# Altium PCB PCB1.PcbDoc
Units mil, origin at the board's own origin, x right, y up, seen from the top; angles counter-clockwise.
Board outline 6000 x 4000 mil, 2 copper layers (Top Layer, Bottom Layer); 68 components, 83 nets, 314 pads, 0 vias.
Unrouted connection lines stored in the file: 177.
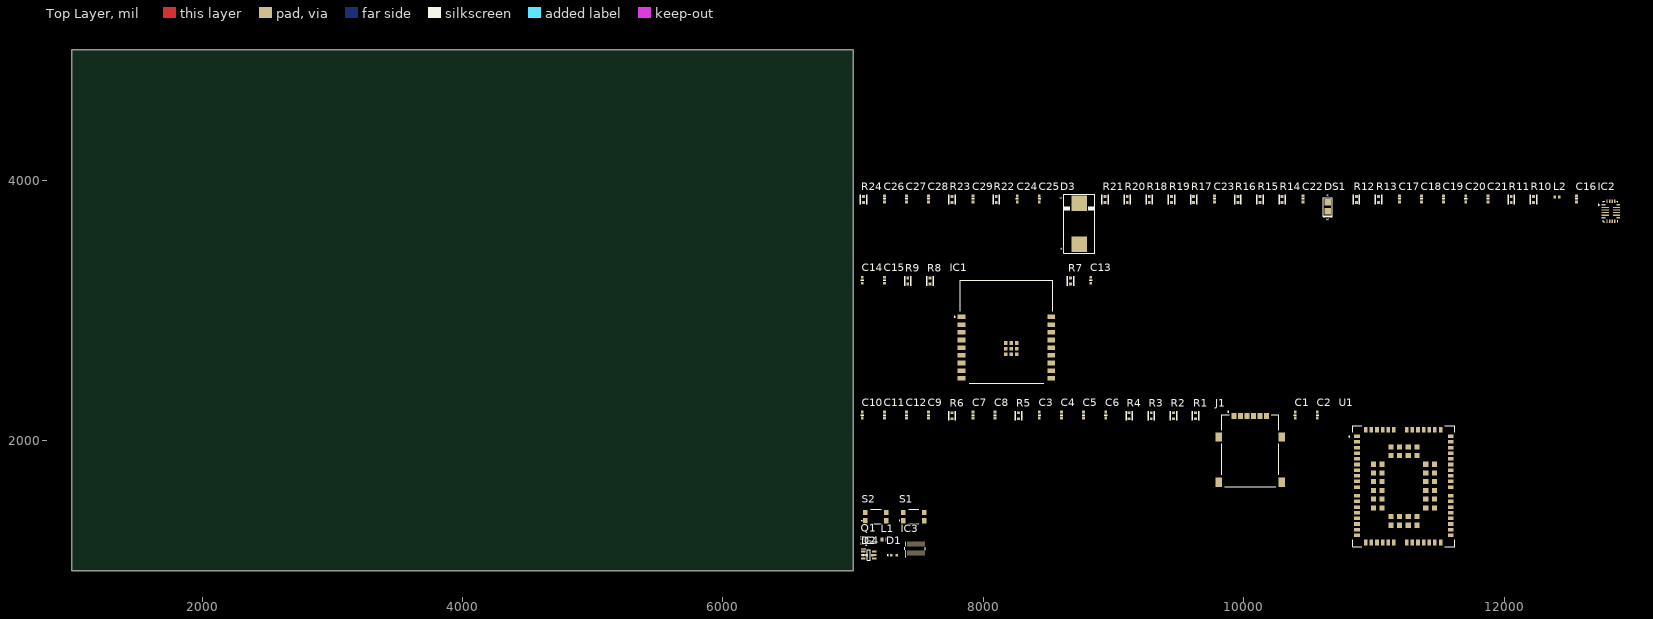
[diagram p0: Top Layer view]
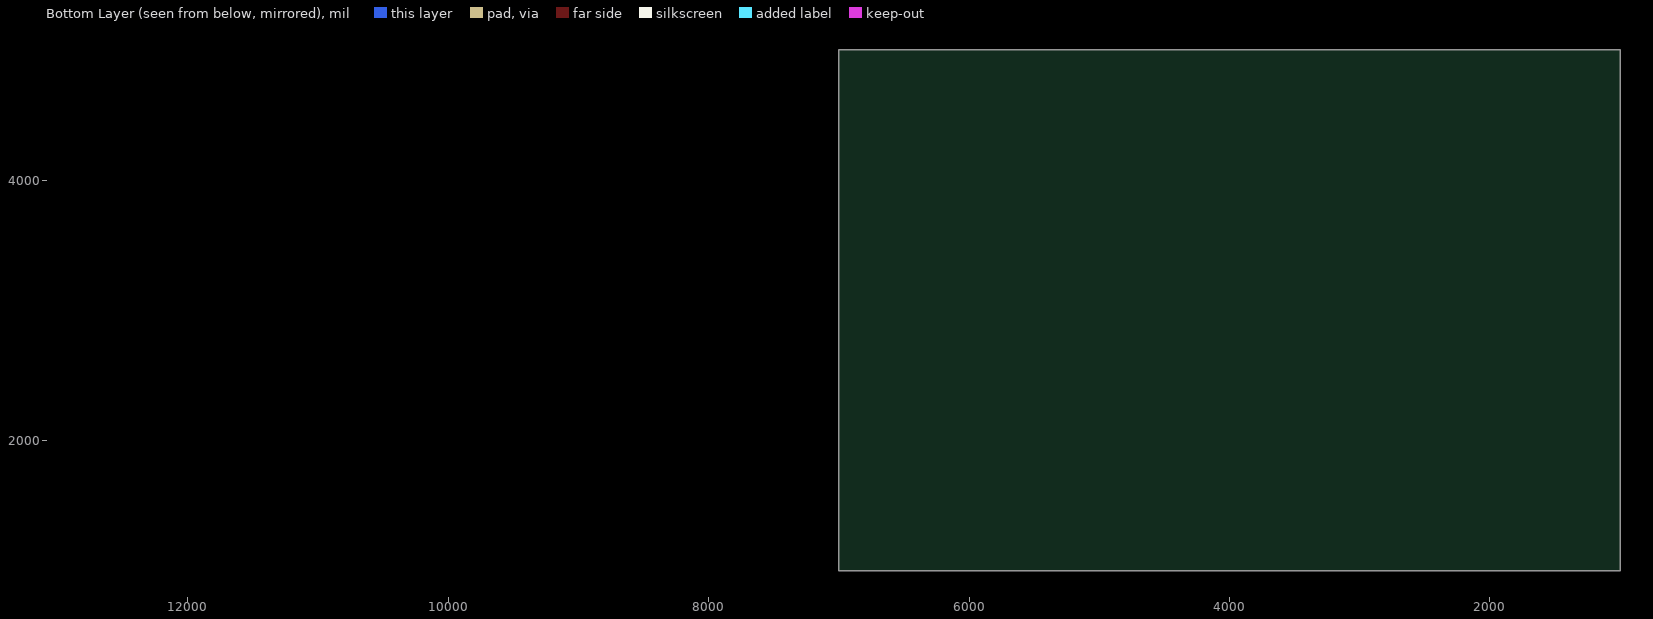
[diagram p1: Bottom Layer view, seen from below]

## Layer stack, top to bottom
Top Solder: solder mask 0.4, Solder Resist, Dk 3.5
Top Layer: signal copper 1.4
Dielectric 1: dielectric 12.6, FR-4, Dk 4.8
Bottom Layer: signal copper 1.4
Bottom Solder: solder mask 0.4, Solder Resist, Dk 3.5

## Board outline
1000,1000 7000,1000 7000,5000 1000,5000

## Design rules (kind name [scope] priority, off if disabled: settings)
Clearance [All] p1: gap=10 ignorepadtopadclearanceinfootprint=FALSE except(0: Arc-Hole Track-Hole SMDPad-Hole THPad-Hole Via-Hole Fill-Hole Poly-Hole Region-Hole Text-Hole)
PolygonConnect [All] p1: connectstyle=Relief reliefconductorwidth=10 reliefentries=4 polygonreliefangle="90 Angle" airgapwidth=10
RoomDefinition MP2617B-SHEET [InComponentClass('MP2617B-SHEET')] p1: confinementstyle=ConfineIn formatcopy=TRUE lockcomponents=FALSE outline 7045,2140 12940,2140 12940,4000 7045,4000
RoomDefinition ESP32WROOM-SHEET [InComponentClass('ESP32WROOM-SHEET')] p2: confinementstyle=ConfineIn formatcopy=TRUE lockcomponents=FALSE outline 7045,2140 12940,2140 12940,4000 7045,4000
RoomDefinition BG95-SHEEET [InComponentClass('BG95-SHEEET')] p3: confinementstyle=ConfineIn formatcopy=TRUE lockcomponents=FALSE outline 7045,1060 12665,1060 12665,4000 7045,4000
RoutingVias [All] p1: holewidth=28 width=50 viastyle="Through Hole" minholewidth=28 minwidth=50 maxholewidth=28 maxwidth=50
SolderMaskExpansion [All] p1: expansion=4 istentingtop=FALSE
Width [All] p1: maxlimit=10 minlimit=10 preferedwidth=10
30 further rules are at their usual default settings.

## Classes and differential pairs
component class MP2617B-SHEET: C16 C17 C18 C19 C20 C21 C22 C23 C24 C25 C26 C27 C28 C29 D3 DS1 IC2 L2 R10 R11 R12 R13 R14 R15 R16 R17 R18 R19 R20 R21 R22 R23 R24
component class ESP32WROOM-SHEET: BOOT C13 C14 C15 IC1 R7 R8 R9 RST S1 S2
component class BG95-SHEEET: C1 C2 C3 C4 C5 C6 C7 C8 C9 C10 C11 C12 D1 D2 IC3 IC4 J1 L1 Q1 Q? R1 R2 R3 R4 R5 R6 U1

## Components (designator, comment, footprint, x,y, rotation, side; value= is the part's Value field where it differs from the comment)
C1 "0.10µF" SMD-0402C 10395,2195 r0 top
C2 "0.10µF" SMD-0402C 10565,2195 r0 top
C3 "0.10µF" SMD-0402C 8430,2195 r0 top
C4 "0.10µF" SMD-0402C 8600,2195 r0 top
C5 "0.10µF" SMD-0402C 8770,2195 r0 top
C6 "0.10µF" SMD-0402C 8940,2195 r0 top
C7 "0.10µF" SMD-0402C 7920,2195 r0 top
C8 "0.10µF" SMD-0402C 8090,2195 r0 top
C9 "100" SMD-0402C 7580,2195 r0 top value=0.10µF
C10 "0.10µF" SMD-0402C 7070,2195 r0 top
C11 "0.10µF" SMD-0402C 7240,2195 r0 top
C12 "0.10µF" SMD-0402C 7410,2195 r0 top
C13 "0.10µF" SMD-0402C 8825,3230 r0 top
C14 "1µF" SMD-0402C 7070,3230 r0 top
C15 "10µF" SMD-0402C 7240,3230 r0 top
C16 "0.10µF" SMD-0402C 12555,3855 r0 top
C17 "2200pF" SMD-0402C 11195,3855 r0 top
C18 "2200pF" SMD-0402C 11365,3855 r0 top
C19 "1µF" SMD-0402C 11535,3855 r0 top
C20 "1µF" SMD-0402C 11705,3855 r0 top
C21 "0.10µF" SMD-0402C 11875,3855 r0 top
C22 "0.10µF" SMD-0402C 10455,3855 r0 top
C23 "1µF" SMD-0402C 9775,3855 r0 top
C24 "2200pF" SMD-0402C 8260,3855 r0 top
C25 "10µF" SMD-0402C 8430,3855 r0 top
C26 "10µF" SMD-0402C 7240,3855 r0 top
C27 "4.7µF" SMD-0402C 7410,3855 r0 top
C28 "0.10µF" SMD-0402C 7580,3855 r0 top
C29 "0.10µF" SMD-0402C 7920,3855 r0 top
D1 "EZA-EG2A50AX" EZAEG2A50AX 7315,1120 r0 top
D2 "EZA-EG2A50AX" EZAEG2A50AX 7125,1120 r0 top
D3 "SS54C-HF" DIO_SMC_DO-214AB 8735,3665 r90 top
DS1 "RED LED" LED_0805 10645,3795 r90 top
IC1 "ESP32-C3-WROOM-02-N4" ESP32C3WROOM02N4 8215,2705 r0 top
IC2 "MP2617BGL-P" MP2617AGLP 12820,3760 r0 top
IC3 "TXB0108DQSR" TXB0108DQSR 7475,1170 r0 top
IC4 "SMF05CT2G" SOT65P210X110-6N 7120,1120 r0 top
J1 "SIM8060-6-0-14-00-A" GCT_SIM8060-6-0-14-00-A 10050,1920 r0 top
L1 "LQW15AN4N0B80D" INDC1006X60N 7240,1240 r0 top
L2 "MLZ1005M1R0WT000" IND_MLZ1005M1R0WT000 12405,3870 r0 top
Q1 "DTC043ZEBTL" SOTFL50P160X85-3N 7100,1225 r0 top
R1 "51" SMD-0402-RES 9630,2190 r0 top
R2 "51" SMD-0402-RES 9460,2190 r0 top
R3 "15k" SMD-0402-RES 9290,2190 r0 top
R4 "51" SMD-0402-RES 9120,2190 r0 top
R5 "0" SMD-0402-RES 8270,2190 r0 top value=10
R6 "10" SMD-0402-RES 7760,2190 r0 top
R7 "10k" SMD-0402-RES 8670,3225 r0 top
R8 "10k" SMD-0402-RES 7590,3225 r0 top
R9 "10k" SMD-0402-RES 7420,3225 r0 top
R10 "2k" SMD-0402-RES 12225,3850 r0 top
R11 "10k" SMD-0402-RES 12055,3850 r0 top
R12 "0" SMD-0402-RES 10865,3850 r0 top value=0.047
R13 "0" SMD-0402-RES 11035,3850 r0 top value=0.047
R14 "0" SMD-0402-RES 10295,3850 r0 top value=0.047
R15 "1k" SMD-0402-RES 10125,3850 r0 top
R16 "10k" SMD-0402-RES 9955,3850 r0 top
R17 "24k" SMD-0402-RES 9615,3850 r0 top
R18 "2.7k" SMD-0402-RES 9275,3850 r0 top
R19 "10k" SMD-0402-RES 9445,3850 r0 top
R20 "20k" SMD-0402-RES 9105,3850 r0 top
R21 "10M" SMD-0402-RES 8935,3850 r0 top
R22 "0" SMD-0402-RES 8100,3850 r0 top value=0.047
R23 "10M" SMD-0402-RES 7760,3850 r0 top
R24 "10k" SMD-0402-RES 7080,3850 r0 top
S1 "KMR241NGLFS" KMR241NGLFS 7465,1415 r0 top
S2 "KMR241NGLFS" KMR241NGLFS 7175,1415 r0 top
U1 "BG95M3LA-64-SGNS" XCVR_BG95M3LA-64-SGNS 11230,1650 r0 top

## Footprints (in the part's own frame and the unit in brackets; to place one, negate y for a bottom-side part, rotate by r counter-clockwise, add the part's x,y. Pads: shape width x height; smd on the part's side, far side on the other; paste and mask are expansions set on the pad)
DIO_SMC_DO-214AB [mm] "Diode"
  rect 3x3 smd: A(-4.038,-0.016) K(3.962,-0.016)
  silkscreen extent -5.78,-3.03 5.73,2.97, body extent -3.97,-2.95 3.98,2.95, height 2.27
ESP32C3WROOM02N4 [mm]
  rect 1.5x0.9 smd: 1(-9.71,6.2) 2(-9.71,4.7) 3(-9.71,3.2) 4(-9.71,1.7) 5(-9.71,0.2) 6(-9.71,-1.3) 7(-9.71,-2.8) 8(-9.71,-4.3) 9(-9.71,-5.8) 10(7.79,-5.8) 11(7.79,-4.3) 12(7.79,-2.8) 13(7.79,-1.3) 14(7.79,0.2) 15(7.79,1.7) 16(7.79,3.2) 17(7.79,4.7) 18(7.79,6.2)
  rect 0.7x0.7 smd: 19(0,0) 20(1.1,0) 21(1.1,1.1) 22(0,1.1) 23(-1.1,1.1) 24(-1.1,0) 25(-1.1,-1.1) 26(0,-1.1) 27(1.1,-1.1)
  silkscreen extent -11.16,-6.7 8.04,13.3, body extent -10.31,-6.7 7.69,13.3, height 3.2
EZAEG2A50AX [mm]
  rect 0.475x0.5 smd: 1(-0.525,0) 2(0.525,0)
  silkscreen extent -1.3,-0.1 -1.1,0.1, body extent -0.71,-0.25 0.71,0.25, height 0.48
GCT_SIM8060-6-0-14-00-A [mm]
  rect 0.9x1.2 smd: C1(-3.175,6.8) C2(-0.635,6.8) C3(1.905,6.8) C5(-1.905,6.8) C6(0.635,6.8) C7(3.175,6.8)
  rect 1.3x1.8 smd: S1(-6.15,2.7) S2(6.15,2.7) S3(6.15,-6.1) S4(-6.15,-6.1)
  silkscreen extent -5.6,-7 5.6,7.76
IND_MLZ1005M1R0WT000 [mm]
  rect 0.5x0.5 smd: 1(-0.45,0) 2(0.45,0)
  body extent -0.5,-0.25 0.5,0.25, height 0.55
INDC1006X60N [mm]
  rect 0.51x0.73 smd: 1(-0.46,0) 2(0.46,0)
  body extent -0.5,-0.3 0.5,0.3, height 0.6
KMR241NGLFS [mm]
  rect 0.9x1 smd: 1(-2.05,-0.8) 2(2.05,-0.8) 3(2.05,0.8) 4(-2.05,0.8)
  silkscreen extent -2.8,-1.4 1,1.4, body extent -2.41,-1.4 2.41,1.4, height 2
LED_0805 [mm] "LED"
  rect 1.2x1.2 smd mask+0.076: A(0.889,0) K(-0.889,0)
  silkscreen extent -1.99,-0.89 1.73,0.89, body extent -1.01,-0.62 1.01,0.63, height 1.1
MP2617AGLP [mm]
  rect 0.7x0.25 smd: 1(-1.45,1.25) 6(-1.45,-1.25) 11(1.45,-1.25) 16(1.45,1.25)
  rect 1.4x0.25 smd: 2(-1.1,0.75) 3(-1.1,0.25) 4(-1.1,-0.25) 5(-1.1,-0.75) 12(1.1,-0.75) 13(1.1,-0.25) 14(1.1,0.25) 15(1.1,0.75)
  rect 0.25x0.7 smd: 7(-0.75,-1.95) 8(-0.25,-1.95) 9(0.25,-1.95) 10(0.75,-1.95) 17(0.75,1.95) 18(0.25,1.95) 19(-0.25,1.95) 20(-0.75,1.95)
  silkscreen extent -2.5,-2 1.38,2, body extent -1.49,-2 1.38,2, height 1.15
SMD-0402-RES [mm]
  rect 0.55x0.55 smd: 1(0,0.584) 2(0,-0.584)
  silkscreen extent -0.6,-0.9 0.6,0.9, body extent -0.28,-0.57 0.27,0.58, height 0.41
SMD-0402C [mm]
  rect 0.55x0.55 smd: 1(0,0.584) 2(0,-0.584)
  silkscreen extent -0.25,0 0.25,0, body extent -0.25,-0.51 0.25,0.51, height 0.51
SOT65P210X110-6N [mm]
  rect 0.85x0.4 smd: 1(-1.05,0.65) 2(-1.05,0) 3(-1.05,-0.65) 4(1.05,-0.65) 5(1.05,0) 6(1.05,0.65)
  silkscreen extent -1.48,-1 0.28,1.2, body extent -1.05,-1 1.05,1, height 1.1
SOTFL50P160X85-3N [mm]
  rect 0.64x0.47 smd: 1(-0.75,0.5) 2(-0.75,-0.5) 3(0.75,0)
  silkscreen extent -1.07,-0.8 0.08,0.98, body extent -0.8,-0.8 0.8,0.8, height 0.85
TXB0108DQSR [mm]
  rect 0.2x1.1 smd: 1(-1.8,-0.85)
  rect 0.2x1 smd: 2(-1.4,-0.9) 3(-1,-0.9) 4(-0.6,-0.9) 5(-0.2,-0.9) 6(0.2,-0.9) 7(0.6,-0.9) 8(1,-0.9) 9(1.4,-0.9) 10(1.8,-0.9) 11(1.8,0.9) 12(1.4,0.9) 13(1,0.9) 14(0.6,0.9) 15(0.2,0.9) 16(-0.2,0.9) 17(-0.6,0.9) 18(-1,0.9) 19(-1.4,0.9) 20(-1.8,0.9)
  silkscreen extent -2,-1.6 2,0.3, body extent -2,-1 2,1, height 0.55
XCVR_BG95M3LA-64-SGNS [mm]
  rect 1.1x0.7 smd paste-2: 1(-9.15,9.7) 2(-9.15,8.6) 3(-9.15,7.5) 4(-9.15,6.4) 5(-9.15,5.3) 6(-9.15,4.2) 7(-9.15,3.1) 8(-9.15,2) 9(-9.15,0.9) 10(-9.15,-0.2) 11(-9.15,-1.9) 12(-9.15,-3) 13(-9.15,-4.1) 14(-9.15,-5.2) 15(-9.15,-6.3) 16(-9.15,-7.4) 17(-9.15,-8.5) 18(-9.15,-9.6) 32(9.15,-9.6) 33(9.15,-8.5) 34(9.15,-7.4) 35(9.15,-6.3) 36(9.15,-5.2) 37(9.15,-4.1) 38(9.15,-3) 39(9.15,-1.9) 40(9.15,-0.2) 41(9.15,0.9) 42(9.15,2) 43(9.15,3.1) 44(9.15,4.2) 45(9.15,5.3) 46(9.15,6.4) 47(9.15,7.5) 48(9.15,8.6) 49(9.15,9.7)
  rect 0.7x1.1 smd paste-2: 19(-7.45,-11) 20(-6.35,-11) 21(-5.25,-11) 22(-4.15,-11) 23(-3.05,-11) 24(-1.95,-11) 25(0.55,-11) 26(1.65,-11) 27(2.75,-11) 28(3.85,-11) 29(4.95,-11) 30(6.05,-11) 31(7.15,-11) 50(7.15,11) 51(6.05,11) 52(4.95,11) 53(3.85,11) 54(2.75,11) 55(1.65,11) 56(0.55,11) 57(-1.95,11) 58(-3.05,11) 59(-4.15,11) 60(-5.25,11) 61(-6.35,11) 62(-7.45,11)
  rect 1x1 smd paste-1: 63(-5.95,4.25) 64(-5.95,2.55) 65(-5.95,0.85) 66(-5.95,-0.85) 67(-5.95,-2.55) 68(-5.95,-4.25) 69(-2.55,-7.65) 70(-0.85,-7.65) 71(0.85,-7.65) 72(2.55,-7.65) 73(5.95,-4.25) 74(5.95,-2.55) 75(5.95,-0.85) 76(5.95,0.85) 77(5.95,2.55) 78(5.95,4.25) 79(2.55,7.65) 80(0.85,7.65) 81(-0.85,7.65) 82(-2.55,7.65) 83(-4.25,4.25) 84(-4.25,2.55) 85(-4.25,0.85) 86(-4.25,-0.85) 87(-4.25,-2.55) 88(-4.25,-4.25) 89(-2.55,-5.95) 90(-0.85,-5.95) 91(0.85,-5.95) 92(2.55,-5.95) 93(4.25,-4.25) 94(4.25,-2.55) 95(4.25,-0.85) 96(4.25,0.85) 97(4.25,2.55) 98(4.25,4.25) 99(2.55,5.95) 100(0.85,5.95) 101(-0.85,5.95) 102(-2.55,5.95)
  silkscreen extent -10.77,-11.8 9.95,11.8, body extent -9.95,-11.8 9.95,11.8, height 2.4

## Part data
C1 C2 C3 C4 C5 C6 C7 C8 C9 C10 C11 C12 C13 C16 C21 C22 C28 C29: library part GRM152R61A104KE19D, "CAP CER 0.1UF 10V X5R 0402", Digi-Key Part Number=490-10008-1-ND, Manufacturer="Murata Electronics North America", Operating Temperature="-55°C ~ 85°C", Package / Case="0402 (1005 Metric)", Ratings=-, Temperature Coefficient=X5R, Tolerance=±10%, Voltage=10V, @ qty=0, Applications="General Purpose", Datasheets=http://www.murata.com/~/media/webrenewal/support/library/catalog/products/capacitor/mlcc/c02e.pdf, Factory Stock=0, Features="Derating Recommended", Height - Seated (Max)=-, Image=//media.digikey.com/Renders/Murata%20Renders/ZRB-SERIES-0402.jpg, Lead Spacing=-, Lead Style=-, Minimum Quantity=1, Mounting Type="Surface Mount, MLCC", Packaging="Cut Tape (CT)", Part Number=GRM152R61A104KE19D, Part Status=Active, Quantity Available=80241, Series=GRM, Size / Dimension="0.039\" L x 0.020\" W (1.00mm x 0.50mm)", Thickness (Max)="0.009\" (0.22mm)", Unit Price (USD)=0.16
C14 C19 C20 C23: library part GCM155C71A105KE38D, "CAP CER 1UF 10V X7S 0402", Digi-Key Part Number=490-13409-1-ND, Manufacturer="Murata Electronics North America", Operating Temperature="-55°C ~ 125°C", Package / Case="0402 (1005 Metric)", Ratings=AEC-Q200, Temperature Coefficient=X7S, Tolerance=±10%, Voltage=10V, @ qty=0, Applications=Automotive, Datasheets=http://www.murata.com/~/media/webrenewal/support/library/catalog/products/capacitor/mlcc/c03e.ashx, Factory Stock=0, Features=-, Height - Seated (Max)=-, Image=//media.digikey.com/Renders/Murata%20Renders/ZRB-SERIES-0402.jpg, Lead Spacing=-, Lead Style=-, Minimum Quantity=1, Mounting Type="Surface Mount, MLCC", Packaging="Cut Tape (CT)", Part Number=GCM155C71A105KE38D, Part Status=Active, Quantity Available=7240, Series=GCM, Size / Dimension="0.039\" L x 0.020\" W (1.00mm x 0.50mm)", Thickness (Max)="0.022\" (0.55mm)", Unit Price (USD)=0.12
C15 C25 C26: library part GRJ155R60J106ME11D, "CAP CER 10UF 10V X5R 0402", Digi-Key Part Number=490-13211-1-ND, Manufacturer="Murata Electronics North America", Operating Temperature="-55°C ~ 85°C", Package / Case="0402 (1005 Metric)", Ratings=-, Temperature Coefficient=X5R, Tolerance=±20%, Voltage=6.3V, @ qty=0, Applications="Boardflex Sensitive", Datasheets=http://psearch.en.murata.com/capacitor/product/GRJ155R60J106ME11%23.pdf, Factory Stock=0, Features="Derating Recommended, Soft Termination", Height - Seated (Max)=-, Image=//media.digikey.com/Renders/Murata%20Renders/ZRB-SERIES-0402.jpg, Lead Spacing=-, Lead Style=-, Minimum Quantity=1, Mounting Type="Surface Mount, MLCC", Packaging="Cut Tape (CT)", Part Number=GRJ155R60J106ME11D, Part Status=Active, Quantity Available=64064, Series=GRJ, Size / Dimension="0.039\" L x 0.020\" W (1.00mm x 0.50mm)", Thickness (Max)="0.028\" (0.70mm)", Unit Price (USD)=0.23
C17 C18 C24: library part GRM155R61A222KA01D, "CAP CER 22uF 10V X5R 0402", Digi-Key Part Number=490-8251-1-ND, Manufacturer="Murata Electronics North America", Operating Temperature="-55°C ~ 85°C", Package / Case="0402 (1005 Metric)", Ratings=-, Temperature Coefficient=X5R, Tolerance=±10%, Voltage=10V, @ qty=0, Applications="General Purpose", Datasheets=http://www.murata.com/~/media/webrenewal/support/library/catalog/products/capacitor/mlcc/c02e.pdf, Factory Stock=0, Features=-, Height - Seated (Max)=-, Image=//media.digikey.com/Renders/Murata%20Renders/ZRB-SERIES-0402.jpg, Lead Spacing=-, Lead Style=-, Minimum Quantity=1, Mounting Type="Surface Mount, MLCC", Packaging="Cut Tape (CT)", Part Number=GRM155R61A222KA01D, Part Status=Active, Quantity Available=58128, Series=GRM, Size / Dimension="0.039\" L x 0.020\" W (1.00mm x 0.50mm)", Thickness (Max)="0.022\" (0.55mm)", Unit Price (USD)=0.1
C27: library part ZRB15XR61A475KE01D, "CAP CER 4.7UF 10V X5R 0402", Digi-Key Part Number=490-13252-1-ND, Manufacturer="Murata Electronics North America", Operating Temperature="-55°C ~ 85°C", Package / Case="0402 (1005 Metric)", Ratings=-, Temperature Coefficient=X5R, Tolerance=±10%, Voltage=10V, @ qty=0, Applications="Acoustic Noise Reduction", Datasheets=http://search.murata.co.jp/Ceramy/image/img/A01X/G101/ENG/ZRB15XR61A475KE01-01.pdf, Factory Stock=0, Features="Derating Recommended, Interposer Termination", Height - Seated (Max)=-, Image=//media.digikey.com/Renders/Murata%20Renders/ZRB-SERIES-0402.jpg, Lead Spacing=-, Lead Style=-, Minimum Quantity=1, Mounting Type="Surface Mount, MLCC", Packaging="Cut Tape (CT)", Part Number=ZRB15XR61A475KE01D, Part Status=Active, Quantity Available=23076, Series=ZRB, Size / Dimension="0.039\" L x 0.020\" W (1.00mm x 0.50mm)", Thickness (Max)="0.031\" (0.80mm)", Unit Price (USD)=0.28
D1 D2: "Diode ESD (Bi-directional)", Manufacturer_Name=Panasonic, Mouser Part Number=667-EZA-EG2A50AX, Arrow Part Number=EZA-EG2A50AX, Arrow Price/Stock=https://www.arrow.com/en/products/eza-eg2a50ax/panasonic, Datasheet Link=https://industrial.panasonic.com/cdbs/www-data/pdf/AWD0000/AWD0000C23.pdf, Height=0.38mm, Manufacturer_Part_Number=EZA-EG2A50AX, Mouser Price/Stock=https://www.mouser.co.uk/ProductDetail/Panasonic/EZA-EG2A50AX?qs=WwqriLBepZuVGjkTEFYPQg%3D%3D, Simulation Data=https://industrial.panasonic.com/content/data/CC/files/EZAEG2A50AX.zip
D3: library part DIO-S_0.42-40V-5A-DO-214AB, "Schottky Diodes & Rectifiers 5A,40V,SM SCHOTTKY RECT", Alternate Part Number-1=NA, Case/Package=DO-214AB, Manufacturer="Vishay Semiconductors", ComponentLink1Description="New link", Manufacturer Part Number=SS54C-HF, Supplier Part Number-1=SS54C-HF, Supplier-1=Mouser
DS1: library part LED_RED-2V-20mA-0805, "Red 631nm LED Indication - Discrete 2V 0805 (2012 Metric)", Alternate Part Number-1=NA, Case/Package=0805, Manufacturer="Vishay Lite-On", Manufacturer Part Number=LTST-C171KRKT, Supplier Part Number-1=LTST-C171KRKT, Supplier-1="SP ROAD"
IC1: "Integrated Circuit", Manufacturer_Name="Espressif Systems", Mouser Part Number=356-ESP32C3WROOM02N4, Datasheet Link=https://www.mouser.ch/datasheet/2/891/Espressif_ESP32_C3_WROOM_02-2006871.pdf, Height=3.35mm, Manufacturer_Part_Number=ESP32-C3-WROOM-02-N4, Mouser Price/Stock=https://www.mouser.co.uk/ProductDetail/Espressif-Systems/ESP32-C3-WROOM-02-N4?qs=stqOd1AaK7%2FqjTZKEOgfUg%3D%3D
IC2: "Integrated Circuit", Manufacturer_Name="Monolithic Power Systems (MPS)", Mouser Part Number=946-MP2617BGL-P, Datasheet Link=https://www.monolithicpower.com/pub/media/document/m/p/mp2617a_mp2617b_r1.23_2.pdf, Height=1.05mm, Manufacturer_Part_Number=MP2617BGL-P, Mouser Price/Stock=https://www.mouser.co.uk/ProductDetail/Monolithic-Power-Systems-MPS/MP2617BGL-P?qs=IW9Tsl75qsVicCXRSj7%2FvQ%3D%3D
IC3: "Integrated Circuit", Manufacturer_Name="Texas Instruments", Mouser Part Number=595-TXB0108DQSR, Arrow Part Number=TXB0108DQSR, Arrow Price/Stock=https://www.arrow.com/en/products/txb0108dqsr/texas-instruments?region=nac, Datasheet Link=http://www.ti.com/lit/gpn/txb0108, Height=0mm, Manufacturer_Part_Number=TXB0108DQSR, Mouser Price/Stock=https://www.mouser.co.uk/ProductDetail/Texas-Instruments/TXB0108DQSR?qs=EuM%2FBx4ov4SMZCOlCh%2FWxA%3D%3D
IC4: "Integrated Circuit", Manufacturer_Name=onsemi, Mouser Part Number=863-SMF05CT2G, Arrow Part Number=SMF05CT2G, Arrow Price/Stock=https://www.arrow.com/en/products/smf05ct2g/on-semiconductor?region=nac, Datasheet Link=http://www.onsemi.com/pub/Collateral/SMF05C-D.PDF, Height=1.1mm, Manufacturer_Part_Number=SMF05CT2G, Mouser Price/Stock=https://www.mouser.co.uk/ProductDetail/onsemi/SMF05CT2G?qs=xZq1yRCsb1fkTB9yOMghAg%3D%3D
J1: "SIM8060 is a hinged Sim Card Connector. With 6 contacts, with switch for card detection. Profile above PCB is 1.43mm.", Package=None, Availability=Unavailable, MF="{'manufacturer': u'Global Connector Technology'}", MP=SIM8060-6-0-14-00-A, Price=None
L1: "Ind RF Chip Unshielded Wirewound 4nH 0.1nH 100MHz 30Q-Factor 1950mA 0402 Paper T/R", Package=None, Availability=Unavailable, MF="{'manufacturer': u'Murata'}", MP=LQW15AN4N0B80D, Price=None
L2: Package=None, Availability=Unavailable, MF="{'manufacturer': u'TDK'}", MP=MLZ1005M1R0WT000, Price=None
Q1: "Transistor BJT NPN", Manufacturer_Name="ROHM Semiconductor", Mouser Part Number=755-DTC043ZEBTL, Datasheet Link=http://rohmfs.rohm.com/en/products/databook/datasheet/discrete/transistor/digital/dtc043zmt2l-e.pdf, Height=0.85mm, Manufacturer_Part_Number=DTC043ZEBTL, Mouser Price/Stock=https://www.mouser.co.uk/ProductDetail/ROHM-Semiconductor/DTC043ZEBTL?qs=n7vHx8wJlDGyWrBOh0icRQ%3D%3D
R1 R2 R4: library part ERJ-2GEJ510X, "RES SMD 51 OHM 5% 1/10W 0402", Digi-Key Part Number=P51JCT-ND, Manufacturer="Panasonic Electronic Components", Operating Temperature="-55°C ~ 155°C", Package / Case="0402 (1005 Metric)", Power (Watts)="0.1W, 1/10W", Supplier Device Package=0402, Temperature Coefficient=±200ppm/°C, Tolerance=±5%, @ qty=1500, Composition="Thick Film", Datasheets=http://industrial.panasonic.com/www-cgi/jvcr13pz.cgi?E+PZ+3+AOA0001+ERJ2GEJ510X+7+WW, Factory Stock=0, Failure Rate=-, Features="Automotive AEC-Q200", Height - Seated (Max)="0.016\" (0.40mm)", Image=//media.digikey.com/Photos/Panasonic%20Photos/ERJ-PA2-Series.jpg, Minimum Quantity=1, Number of Terminations=2, Packaging="Cut Tape (CT)", Part Number=ERJ-2GEJ510X, Part Status=Active, Quantity Available=159188, Series=ERJ, Size / Dimension="0.039\" L x 0.020\" W (1.00mm x 0.50mm)", Unit Price (USD)=0.00350
R3: library part ERJ-2GEJ153X, "RES SMD 15K OHM 5% 1/10W 0402", Digi-Key Part Number=P15KJCT-ND, Manufacturer="Panasonic Electronic Components", Operating Temperature="-55°C ~ 155°C", Package / Case="0402 (1005 Metric)", Power (Watts)="0.1W, 1/10W", Supplier Device Package=0402, Temperature Coefficient=±200ppm/°C, Tolerance=±5%, @ qty=1500, Composition="Thick Film", Datasheets=http://industrial.panasonic.com/www-cgi/jvcr13pz.cgi?E+PZ+3+AOA0001+ERJ2GEJ153X+7+WW, Factory Stock=0, Failure Rate=-, Features="Automotive AEC-Q200", Height - Seated (Max)="0.016\" (0.40mm)", Image=//media.digikey.com/Photos/Panasonic%20Photos/ERJ-PA2-Series.jpg, Minimum Quantity=1, Number of Terminations=2, Packaging="Cut Tape (CT)", Part Number=ERJ-2GEJ153X, Part Status=Active, Quantity Available=331812, Series=ERJ, Size / Dimension="0.039\" L x 0.020\" W (1.00mm x 0.50mm)", Unit Price (USD)=0.00350
R5 R6: library part ERJ-2GEJ100X, "RES SMD 10 OHM 5% 1/10W 0402", Digi-Key Part Number=P10JCT-ND, Manufacturer="Panasonic Electronic Components", Operating Temperature="-55°C ~ 155°C", Package / Case="0402 (1005 Metric)", Power (Watts)="0.1W, 1/10W", Supplier Device Package=0402, Temperature Coefficient=±200ppm/°C, Tolerance=±5%, @ qty=1500, Composition="Thick Film", Datasheets=http://industrial.panasonic.com/www-cgi/jvcr13pz.cgi?E+PZ+3+AOA0001+ERJ2GEJ100X+7+WW, Factory Stock=0, Failure Rate=-, Features="Automotive AEC-Q200", Height - Seated (Max)="0.016\" (0.40mm)", Image=//media.digikey.com/Photos/Panasonic%20Photos/ERJ-PA2-Series.jpg, Minimum Quantity=1, Number of Terminations=2, Packaging="Cut Tape (CT)", Part Number=ERJ-2GEJ100X, Part Status=Active, Quantity Available=1054751, Series=ERJ, Size / Dimension="0.039\" L x 0.020\" W (1.00mm x 0.50mm)", Unit Price (USD)=0.00350
R7 R8 R9 R11 R16 R19 R24: library part ERJ-2GEJ103X, "RES SMD 10K OHM 5% 1/10W 0402", Digi-Key Part Number=P10KJCT-ND, Manufacturer="Panasonic Electronic Components", Operating Temperature="-55°C ~ 155°C", Package / Case="0402 (1005 Metric)", Power (Watts)="0.1W, 1/10W", Supplier Device Package=0402, Temperature Coefficient=±200ppm/°C, Tolerance=±5%, @ qty=1500, Composition="Thick Film", Datasheets=http://industrial.panasonic.com/www-cgi/jvcr13pz.cgi?E+PZ+3+AOA0001+ERJ2GEJ103X+7+WW, Factory Stock=0, Failure Rate=-, Features="Automotive AEC-Q200", Height - Seated (Max)="0.016\" (0.40mm)", Image=//media.digikey.com/Photos/Panasonic%20Photos/ERJ-PA2-Series.jpg, Minimum Quantity=1, Number of Terminations=2, Packaging="Cut Tape (CT)", Part Number=ERJ-2GEJ103X, Part Status=Active, Quantity Available=2560215, Series=ERJ, Size / Dimension="0.039\" L x 0.020\" W (1.00mm x 0.50mm)", Unit Price (USD)=0.00350
R10: library part ERJ-2GEJ202X, "RES SMD 2K OHM 5% 1/10W 0402", Digi-Key Part Number=P2.0KJCT-ND, Manufacturer="Panasonic Electronic Components", Operating Temperature="-55°C ~ 155°C", Package / Case="0402 (1005 Metric)", Power (Watts)="0.1W, 1/10W", Supplier Device Package=0402, Temperature Coefficient=±200ppm/°C, Tolerance=±5%, @ qty=1500, Composition="Thick Film", Datasheets=http://industrial.panasonic.com/www-cgi/jvcr13pz.cgi?E+PZ+3+AOA0001+ERJ2GEJ202X+7+WW, Factory Stock=0, Failure Rate=-, Features="Automotive AEC-Q200", Height - Seated (Max)="0.016\" (0.40mm)", Image=//media.digikey.com/Photos/Panasonic%20Photos/ERJ-PA2-Series.jpg, Minimum Quantity=1, Number of Terminations=2, Packaging="Cut Tape (CT)", Part Number=ERJ-2GEJ202X, Part Status=Active, Quantity Available=185761, Series=ERJ, Size / Dimension="0.039\" L x 0.020\" W (1.00mm x 0.50mm)", Unit Price (USD)=0.00350
R12 R13 R14 R22: library part ERJ-2BWFR047X, "RES SMD 0.047 OHM 1% 1/4W 0402", Digi-Key Part Number=P.047ATCT-ND, Manufacturer="Panasonic Electronic Components", Operating Temperature="-55°C ~ 155°C", Package / Case="0402 (1005 Metric)", Power (Watts)="0.25W, 1/4W", Supplier Device Package=0402, Temperature Coefficient=±300ppm/°C, Tolerance=±1%, @ qty=1500, Composition="Thick Film", Datasheets=https://industrial.panasonic.com/cdbs/www-data/pdf/RDA0000/AOA0000C239.pdf, Factory Stock=0, Failure Rate=-, Features="Automotive AEC-Q200, Current Sense", Height - Seated (Max)="0.016\" (0.40mm)", Image=//media.digikey.com/Photos/Panasonic%20Photos/ERJ-PA2-Series.jpg, Minimum Quantity=1, Number of Terminations=2, Packaging="Cut Tape (CT)", Part Number=ERJ-2BWFR047X, Part Status=Active, Quantity Available=28112, Series=ERJ, Size / Dimension="0.039\" L x 0.020\" W (1.00mm x 0.50mm)", Unit Price (USD)=0.14280
R15: library part ERJ-2GEJ102X, "RES SMD 1K OHM 5% 1/10W 0402", Digi-Key Part Number=P1.0KJCT-ND, Manufacturer="Panasonic Electronic Components", Operating Temperature="-55°C ~ 155°C", Package / Case="0402 (1005 Metric)", Power (Watts)="0.1W, 1/10W", Supplier Device Package=0402, Temperature Coefficient=±200ppm/°C, Tolerance=±5%, @ qty=1500, Composition="Thick Film", Datasheets=http://industrial.panasonic.com/www-cgi/jvcr13pz.cgi?E+PZ+3+AOA0001+ERJ2GEJ102X+7+WW, Factory Stock=0, Failure Rate=-, Features="Automotive AEC-Q200", Height - Seated (Max)="0.016\" (0.40mm)", Image=//media.digikey.com/Photos/Panasonic%20Photos/ERJ-PA2-Series.jpg, Minimum Quantity=1, Number of Terminations=2, Packaging="Cut Tape (CT)", Part Number=ERJ-2GEJ102X, Part Status=Active, Quantity Available=1939857, Series=ERJ, Size / Dimension="0.039\" L x 0.020\" W (1.00mm x 0.50mm)", Unit Price (USD)=0.00350
R17: library part ERJ-2GEJ243X, "RES SMD 24K OHM 5% 1/10W 0402", Digi-Key Part Number=P24KJCT-ND, Manufacturer="Panasonic Electronic Components", Operating Temperature="-55°C ~ 155°C", Package / Case="0402 (1005 Metric)", Power (Watts)="0.1W, 1/10W", Supplier Device Package=0402, Temperature Coefficient=±200ppm/°C, Tolerance=±5%, @ qty=1500, Composition="Thick Film", Datasheets=http://industrial.panasonic.com/www-cgi/jvcr13pz.cgi?E+PZ+3+AOA0001+ERJ2GEJ243X+7+WW, Factory Stock=0, Failure Rate=-, Features="Automotive AEC-Q200", Height - Seated (Max)="0.016\" (0.40mm)", Image=//media.digikey.com/Photos/Panasonic%20Photos/ERJ-PA2-Series.jpg, Minimum Quantity=1, Number of Terminations=2, Packaging="Cut Tape (CT)", Part Number=ERJ-2GEJ243X, Part Status=Active, Quantity Available=21017, Series=ERJ, Size / Dimension="0.039\" L x 0.020\" W (1.00mm x 0.50mm)", Unit Price (USD)=0.00350
R18: library part ERJ-2GEJ272X, "RES SMD 2.7K OHM 5% 1/10W 0402", Digi-Key Part Number=P2.7KJCT-ND, Manufacturer="Panasonic Electronic Components", Operating Temperature="-55°C ~ 155°C", Package / Case="0402 (1005 Metric)", Power (Watts)="0.1W, 1/10W", Supplier Device Package=0402, Temperature Coefficient=±200ppm/°C, Tolerance=±5%, @ qty=1500, Composition="Thick Film", Datasheets=http://industrial.panasonic.com/www-cgi/jvcr13pz.cgi?E+PZ+3+AOA0001+ERJ2GEJ272X+7+WW, Factory Stock=0, Failure Rate=-, Features="Automotive AEC-Q200", Height - Seated (Max)="0.016\" (0.40mm)", Image=//media.digikey.com/Photos/Panasonic%20Photos/ERJ-PA2-Series.jpg, Minimum Quantity=1, Number of Terminations=2, Packaging="Cut Tape (CT)", Part Number=ERJ-2GEJ272X, Part Status=Active, Quantity Available=78426, Series=ERJ, Size / Dimension="0.039\" L x 0.020\" W (1.00mm x 0.50mm)", Unit Price (USD)=0.00350
R20: library part ERJ-2GEJ203X, "RES SMD 20K OHM 5% 1/10W 0402", Digi-Key Part Number=P20KJCT-ND, Manufacturer="Panasonic Electronic Components", Operating Temperature="-55°C ~ 155°C", Package / Case="0402 (1005 Metric)", Power (Watts)="0.1W, 1/10W", Supplier Device Package=0402, Temperature Coefficient=±200ppm/°C, Tolerance=±5%, @ qty=1500, Composition="Thick Film", Datasheets=http://industrial.panasonic.com/www-cgi/jvcr13pz.cgi?E+PZ+3+AOA0001+ERJ2GEJ203X+7+WW, Factory Stock=0, Failure Rate=-, Features="Automotive AEC-Q200", Height - Seated (Max)="0.016\" (0.40mm)", Image=//media.digikey.com/Photos/Panasonic%20Photos/ERJ-PA2-Series.jpg, Minimum Quantity=1, Number of Terminations=2, Packaging="Cut Tape (CT)", Part Number=ERJ-2GEJ203X, Part Status=Active, Quantity Available=191642, Series=ERJ, Size / Dimension="0.039\" L x 0.020\" W (1.00mm x 0.50mm)", Unit Price (USD)=0.00350
R21 R23: library part ERJ-2GEJ106X, "RES SMD 10M OHM 5% 1/10W 0402", Digi-Key Part Number=P10MJCT-ND, Manufacturer="Panasonic Electronic Components", Operating Temperature="-55°C ~ 155°C", Package / Case="0402 (1005 Metric)", Power (Watts)="0.1W, 1/10W", Supplier Device Package=0402, Temperature Coefficient="-400/ +150ppm/°C", Tolerance=±5%, @ qty=1500, Composition="Thick Film", Datasheets=http://industrial.panasonic.com/www-cgi/jvcr13pz.cgi?E+PZ+3+AOA0001+ERJ2GEJ106X+7+WW, Factory Stock=0, Failure Rate=-, Features="Automotive AEC-Q200", Height - Seated (Max)="0.016\" (0.40mm)", Image=//media.digikey.com/Photos/Panasonic%20Photos/ERJ-PA2-Series.jpg, Minimum Quantity=1, Number of Terminations=2, Packaging="Cut Tape (CT)", Part Number=ERJ-2GEJ106X, Part Status=Active, Quantity Available=54777, Series=ERJ, Size / Dimension="0.039\" L x 0.020\" W (1.00mm x 0.50mm)", Unit Price (USD)=0.00350
S1 S2: "Switch", Manufacturer_Name="C & K COMPONENTS", Mouser Part Number=611-KMR241NGLFS, Arrow Part Number=KMR241NGLFS, Arrow Price/Stock=https://www.arrow.com/en/products/kmr241nglfs/ck, Datasheet Link=https://www.ckswitches.com/media/1479/kmr2.pdf, Height=1.9mm, Manufacturer_Part_Number=KMR241NGLFS, Mouser Price/Stock=https://www.mouser.co.uk/ProductDetail/CK/KMR241NGLFS?qs=sb%252But3Lm4x3MOq2auuFbeg%3D%3D
U1: "Quectel Bg95 Lte Cat M1/Cat Nb2/Egprs Module    <a href=\"https://pricing.snapeda.com/parts/BG95M3LA-64-SGNS/Quectel%20Wireless%20Solutions%20Co.%2C%20Ltd/view-part?ref=eda\">Check prices</a> <a href=\"https://pricing.snapeda.com/parts/BG95M3LA-64-SGNS/Quectel%20Wireless%20Solutions%20Co.%2C%20Ltd/view-part?ref=eda\">Check prices</a>", Package=None, Availability=Unavailable, MF="{'manufacturer': u'Quectel Wireless Solutions Co., Ltd'}", MP=BG95M3LA-64-SGNS, Price=None

## Nets (pads, with @x,y where several pads share a name; then routed paths per layer and width w, separated by ;. In a path a pad name is that pad's centre, name@x,y a point inside that pad or via, vN(x,y) a via of type N, cw(c..) or ccw(c..) an arc to the next point about the centre after c; other vN are vias at no path point)
3V3: C1.1 C13.1 C15.1 IC1.1 IC3.16 R7.2 R8.1 R9.2
5V: C26.1 C27.1 C28.2 IC2.3 R20.2
14: C24.1 C25.1 D3.K IC2.14 R21.2
BAT_C: C29.2 R21.1 R23.2
CTS: U1.36
CTS_GPS_TXD: IC3.4
D+: IC1.14
D-: IC1.13
DBG_RXD: U1.22
DBG_TXD: U1.23
DCD: IC3.8 U1.38
DTR: IC3.7 U1.30
EN: C14.1 IC1.2 R7.1 S1.1
GND: C1.2 C2.2 C3.2 C4.2 C5.2 C6.2 C7.2 C8.2 C10.2 C11.2 C12.2 C13.2 C14.2 C15.2 C17.2 C18.2 C19.2 C20.2 C21.1 C22.2 C23.1 C24.2 C25.2 C26.2 C27.2 C28.1 C29.1 D1.1 D2.1 D3.A IC1.9 IC1.19 IC1.20 IC1.21 IC1.22 IC1.23 IC1.24 IC1.25 IC1.26 IC1.27 IC2.5 IC2.6 IC2.11 IC3.15 IC4.2 J1.C5 Q1.2 R10.2 R11.2 R12.1 R13.2 R14.1 R19.2 R23.1 R24.1 S1.3 S2.3 U1.3 U1.31 U1.42 U1.47 U1.48 U1.50 U1.54 U1.55 U1.58 U1.59 U1.61 U1.62 U1.67 U1.68 U1.69 U1.70 U1.71 U1.72 U1.73 U1.74 U1.79 U1.80 U1.81 U1.82 U1.89 U1.90 U1.91 U1.100 U1.101 U1.102
GPS_ANT: C9.2 C11.1 U1.49
GPS_ANT_VDD: C12.1 R6.2
GPS_RXD: U1.28
GPS_TXD: U1.27
GSM_ANT: C8.1 R5.2 U1.60
GSM_CTS: IC3.17
GSM_DCD: IC3.13
GSM_DTR: IC3.14
GSM_NET: U1.21
GSM_RI: IC3.12
GSM_RTS: IC3.18
GSM_RXD: IC3.20
GSM_STATUS: IC3.11
GSM_STATUS_INT: IC3.10 U1.20
GSM_TXD: IC3.19
IO0: IC1.18
IO1: IC1.17
IO2: IC1.16 R8.2
IO3: IC1.15
IO4: IC1.3
IO5: IC1.4
IO6: IC1.5
IO7: IC1.6
IO8: IC1.7 R9.1
IO10: IC1.10
MODEM_ON: Q1.1
MODEM_RTC: U1.51
MPS_VCC: C23.2 IC2.20 R15.1 R16.1
NetC3_1: C3.1 C6.1 IC4.1 J1.C7 R3.2 R4.2
NetC4_1: C4.1 IC4.6 J1.C3 R2.2
NetC5_1: C5.1 IC4.4 J1.C2 R1.2
NetC7_1: C7.1 D1.2 R5.1
NetC9_1: C9.1 C10.1 D2.2 L1.1
NetC16_1: C16.1 IC2.1
NetC16_2: C16.2 IC2.2 IC2.4 IC2.13 L2.2
NetC22_1: C22.1 IC2.18
NetDS1_A: DS1.A R15.2
NetDS1_K: DS1.K IC2.9
NetIC1_8: IC1.8 S2.1
NetIC2_7: IC2.7 R12.2
NetIC2_8: IC2.8 R14.2
NetIC2_12: IC2.12 R18.2 R19.1
NetIC2_15: IC2.15 R10.1
NetIC2_16: IC2.16 R11.1 R16.2
NetIC2_17: IC2.17 R13.1
NetL1_2: L1.2 R6.1
NetR17_1: R17.1 R18.1
NetR20_1: R20.1 R22.2
ON_PIN: Q1.3 U1.15
RI: IC3.9 U1.39
RTS: U1.37
RTS_GPS_RXD: IC3.3
RX: IC1.11
RXD: IC3.1 U1.34
SIM_CLK: R2.1 U1.46
SIM_DATA: R4.1 U1.45
SIM_RST: R1.1 U1.44
SIM_VDD: IC4.3 J1.C1 R3.1 U1.43
TX: IC1.12
TXD: IC3.2 U1.35
USB_BOOT: U1.75
USB_DN_GSM: U1.10
USB_DP_GSM: U1.9
USB_VBUS_GSM: U1.8
VBAT_BB: U1.32 U1.33
VBAT_RF: U1.52 U1.53
VDD_EXT: C2.1 IC3.5 IC3.6 U1.29
VLIM: IC2.19 R22.1 R24.2
VSYS: C17.1 C18.1 C19.1 C20.1 C21.2 L2.1 R17.2
pads on no net: IC2.10 IC4.5 J1.C6 J1.S1 J1.S2 J1.S3 J1.S4 S1.2 S1.4 S2.2 S2.4 U1.1 U1.2 U1.4 U1.5 U1.6 U1.7 U1.11 U1.12 U1.13 U1.14 U1.16 U1.17 U1.18 U1.19 U1.24 U1.25 U1.26 U1.40 U1.41 U1.56 U1.57 U1.63 U1.64 U1.65 U1.66 U1.76 U1.77 U1.78 U1.83 U1.84 U1.85 U1.86 U1.87 U1.88 U1.92 U1.93 U1.94 U1.95 U1.96 U1.97 U1.98 U1.99

## Text inside footprints (layer, text, board x,y; h text height)
D3: Top Overlay "K" at 8605.64,3851.02 h20 r90; Top Overlay "A" at 8610.64,3461.02 h20 r90
DS1: Top Overlay "K" at 10654.85,3687.72 h22 r90; Top Overlay "A" at 10651.89,3873.25 h20 r90